# EAGLE board Dual H Bridge and Accessories (EAGLE 6.2)
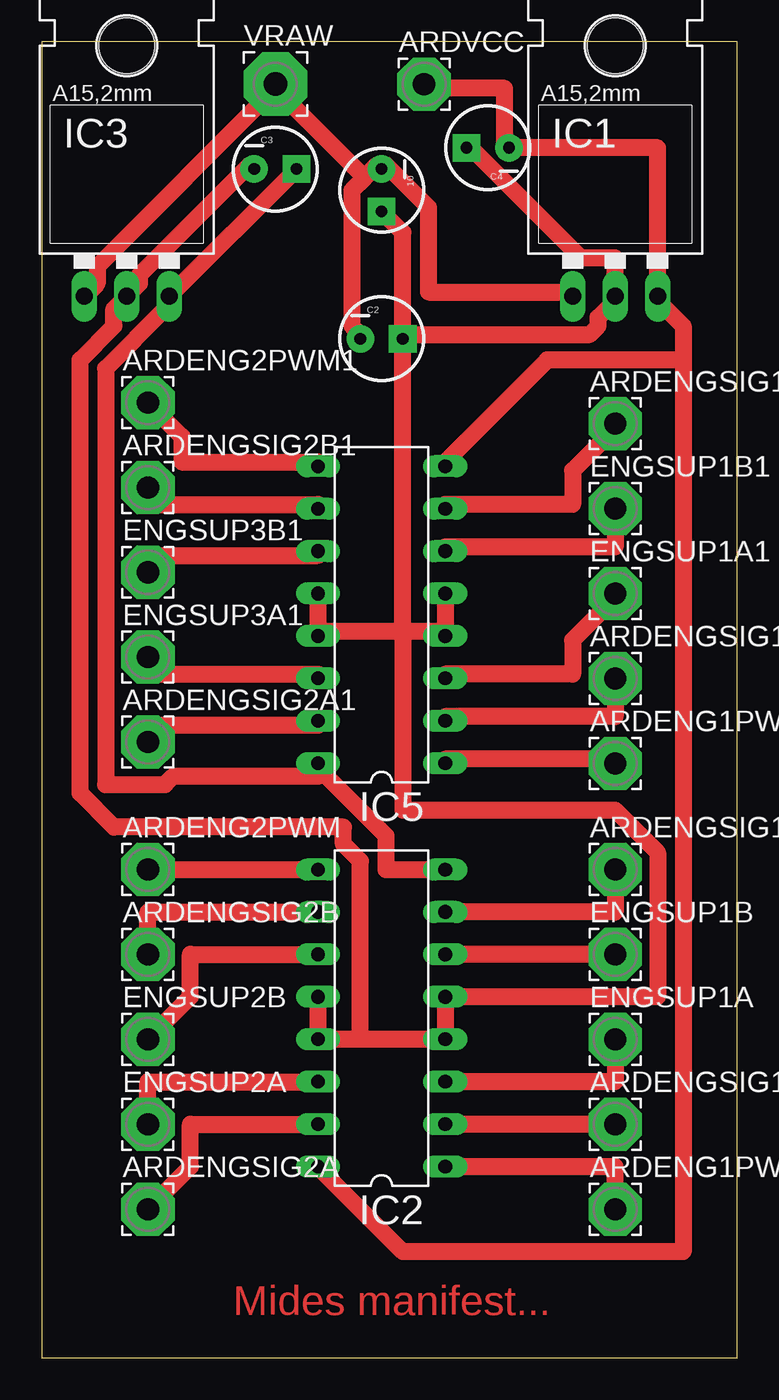
[diagram p0: board, top side]

Size 41.58 x 78.73 mm. Coordinates in mm from the lower left corner, seen from the top.
Outline: 0,0 41.58,0 41.58,78.73 0,78.73 0,0
Copper layers (1*16): Top 0.035mm / dielectric 1.5mm / Bottom 0.035mm
Design rules: minimum track width 40mil, minimum drill 24mil, track to track 10mil, track to pad 10mil, pad to pad 10mil, via to via 10mil, smd to smd 8mil, copper to edge 10mil, drill to drill 8mil, minimum pad ring 10mil, minimum via ring 8mil, stop-mask expansion 4mil, vias tented up to drill 0mil, thermal gap 10mil

## Footprints (pad centres in the part's own frame; a part is rotated, then mirrored left to right if it is on the bottom)
CPOL-RADIAL-10UF-25V = drill 0.7 pad 1.651 square: 1 1.27,0 | drill 0.7 pad 1.651: 2 -1.27,0
3,17/1,3 = drill 1.321 pad 3.175 octagon: 1 0,0
78XXL = drill 1.016 long: GND 0,-3.81; IN -2.54,-3.81; OUT 2.54,-3.81 | hole 3.302: 0,11.176
DIP16 = drill 0.813 long: 1 -10.16,-3.81; 2 -7.62,-3.81; 3 -5.08,-3.81; 4 -2.54,-3.81; 5 0,-3.81; 6 2.54,-3.81; 7 5.08,-3.81; 8 7.62,-3.81; 9 7.62,3.81; 10 5.08,3.81; 11 2.54,3.81; 12 0,3.81; 13 -2.54,3.81; 14 -5.08,3.81; 15 -7.62,3.81; 16 -10.16,3.81
3,81/1,4 = drill 1.397 pad 3.81 octagon: 1 0,0

## Placement (x,y rotation side)
10  10  [CPOL-RADIAL-10UF-25V]  20.32,69.85 270 top
ARDENG1PWM  Eng 1 Pwm  [3,17/1,3]  34.29,8.89 0 top
ARDENG1PWM1  Eng 1 Pwm  [3,17/1,3]  34.29,35.56 0 top
ARDENG2PWM  Eng2 Pwm  [3,17/1,3]  6.35,29.21 0 top
ARDENG2PWM1  Eng2 Pwm  [3,17/1,3]  6.35,57.15 0 top
ARDENGSIG1A  Eng Sig 1A  [3,17/1,3]  34.29,13.97 0 top
ARDENGSIG1A1  Eng Sig 1A  [3,17/1,3]  34.29,40.64 0 top
ARDENGSIG1B  Eng Sig 1B  [3,17/1,3]  34.29,29.21 0 top
ARDENGSIG1B1  Eng Sig 1B  [3,17/1,3]  34.29,55.88 0 top
ARDENGSIG2A  Eng Sig 2A  [3,17/1,3]  6.35,8.89 0 top
ARDENGSIG2A1  Eng Sig 2A  [3,17/1,3]  6.35,36.83 0 top
ARDENGSIG2B  Eng Sig 2B  [3,17/1,3]  6.35,24.13 0 top
ARDENGSIG2B1  Eng Sig 2B  [3,17/1,3]  6.35,52.07 0 top
ARDVCC  Ard VCC  [3,17/1,3]  22.86,76.2 0 top
C2  10  [CPOL-RADIAL-10UF-25V]  20.32,60.96 0 top
C3  .1  [CPOL-RADIAL-10UF-25V]  13.97,71.12 0 top
C4  .1  [CPOL-RADIAL-10UF-25V]  26.67,72.39 180 top
ENGSUP1A  Eng Sup 1A  [3,17/1,3]  34.29,19.05 0 top
ENGSUP1A1  Eng Sup 1A  [3,17/1,3]  34.29,45.72 0 top
ENGSUP1B  Eng Sup 1B  [3,17/1,3]  34.29,24.13 0 top
ENGSUP1B1  Eng Sup 1B  [3,17/1,3]  34.29,50.8 0 top
ENGSUP2A  Eng Sup 2A  [3,17/1,3]  6.35,13.97 0 top
ENGSUP2B  Eng Sup 2B  [3,17/1,3]  6.35,19.05 0 top
ENGSUP3A1  Eng Sup 2A  [3,17/1,3]  6.35,41.91 0 top
ENGSUP3B1  Eng Sup 2B  [3,17/1,3]  6.35,46.99 0 top
IC1  5v  [78XXL]  34.29,67.31 0 top
IC2  SN754410  [DIP16]  20.32,21.59 90 top
IC3  12v  [78XXL]  5.08,67.31 0 top
IC5  SN754410  [DIP16]  20.32,45.72 90 top
VRAW  VRaw  [3,81/1,4]  13.97,76.2 0 top

## Library data of the parts
10 C2-C4 = SparkFun
ARDENG1PWM ARDENG1PWM1 ARDENG2PWM ARDENG2PWM1 ARDENGSIG1A ARDENGSIG1A1 ARDENGSIG1B ARDENGSIG1B1 ARDENGSIG2A ARDENGSIG2A1 ARDENGSIG2B ARDENGSIG2B1 ARDVCC ENGSUP1A ENGSUP1A1 ENGSUP1B ENGSUP1B1 ENGSUP2A ENGSUP2B ENGSUP3A1 ENGSUP3B1 VRAW = wirepad
IC1 IC3 = v-reg
IC2 IC5 = HBridge

## Nets
ARDENGSIG1A: ARDENGSIG1A.1 IC2.2
ARDENGSIG1A1: ARDENGSIG1A1.1 IC5.2
ARDENGSIG1B: ARDENGSIG1B.1 IC2.7
ARDENGSIG1B1: ARDENGSIG1B1.1 IC5.7
ARDENGSIG2B: ARDENGSIG2B.1 IC2.10
ARDENGSIG2B1: ARDENGSIG2B1.1 IC5.10
GND: 10.1 C2.1 C3.2 C4.1 IC1.GND IC2.4 IC2.5 IC2.12 IC2.13 IC3.GND IC5.4 IC5.5 IC5.12 IC5.13
N$2: 10.2 C2.2 IC1.IN IC3.IN VRAW.1
N$3: ARDENG1PWM.1 IC2.1
N$4: ARDENG2PWM.1 IC2.9
N$6: ARDENGSIG2A.1 IC2.15
N$7: ARDENG1PWM1.1 IC5.1
N$8: ENGSUP1A.1 IC2.3
N$9: ENGSUP1B.1 IC2.6
N$10: ENGSUP2B.1 IC2.11
N$11: ENGSUP2A.1 IC2.14
N$12: C3.1 IC2.8 IC3.OUT IC5.16
N$13: ARDENG2PWM1.1 IC5.9
N$14: ARDENGSIG2A1.1 IC5.15
N$15: ENGSUP1A1.1 IC5.3
N$16: ENGSUP1B1.1 IC5.6
N$17: ENGSUP3B1.1 IC5.11
N$18: ENGSUP3A1.1 IC5.14
N$19: ARDVCC.1 C4.2 IC1.OUT IC2.16 IC5.8

## Tracks (layer width: path | path; a pad name or v marks a point on that pad's centre or on a via)
ARDENGSIG1A
  Top 1.016: ARDENGSIG1A.1 IC2.2
ARDENGSIG1A1
  Top 1.016: ARDENGSIG1A1.1 34.29,38.35 24.13,38.35 IC5.2
ARDENGSIG1B
  Top 1.016: IC2.7 34.29,26.67 ARDENGSIG1B.1
ARDENGSIG1B1
  Top 1.016: IC5.7 24.13,51.05 31.75,51.05 31.75,53.09 34.29,55.63 ARDENGSIG1B1.1
ARDENGSIG2B
  Top 1.016: IC2.10 6.35,26.67 ARDENGSIG2B.1
ARDENGSIG2B1
  Top 1.016: ARDENGSIG2B1.1 6.35,51.05 16.51,51.05 IC5.10
GND
  Top 1.016: 21.59,61.21 32.77,61.21 33.27,61.72 33.27,62.23 34.29,63.25 IC1.GND 34.29,65.79 32.26,65.79 25.65,72.39 C4.1 | 10.1 21.59,67.31 21.59,61.21 | 21.59,61.21 C2.1 21.59,43.43 | C3.2 12.45,71.37 5.84,64.77 5.84,64.26 IC3.GND 4.32,62.74 4.32,61.72 2.29,59.69 2.29,33.78 4.32,31.75 18.03,31.75 18.03,30.73 19.05,29.72 19.05,19.05 | IC2.12 IC2.13 19.05,19.05 | 19.05,19.05 IC2.4 IC2.5 36.83,21.59 36.83,30.23 34.29,32.77 21.59,32.77 21.59,43.43 | IC5.12 16.51,43.43 | IC5.5 24.13,43.43 | 24.13,43.43 21.59,43.43 | 21.59,43.43 16.51,43.43 | 16.51,43.43 IC5.13 | 24.13,43.43 IC5.4
N$2
  Top 1.016: IC1.IN 31.75,63.75 23.11,63.75 23.11,68.83 20.57,71.37 10.2 20.07,71.37 19.3,70.61 | 19.3,70.61 18.54,69.85 18.54,61.72 19.05,61.21 C2.2 | IC3.IN 3.3,64.26 3.3,65.28 13.97,75.95 | 13.97,75.95 19.3,70.61 | 13.97,75.95 VRAW.1
N$3
  Top 1.016: IC2.1 34.29,11.43 ARDENG1PWM.1
N$4
  Top 1.016: ARDENG2PWM.1 IC2.9
N$6
  Top 1.016: IC2.15 8.89,13.97 8.89,11.43 ARDENGSIG2A.1
N$7
  Top 1.016: IC5.1 24.13,35.81 34.29,35.81 ARDENG1PWM1.1
N$8
  Top 1.016: IC2.3 34.29,16.51 ENGSUP1A.1
N$9
  Top 1.016: ENGSUP1B.1 IC2.6
N$10
  Top 1.016: IC2.11 8.89,24.13 8.89,21.59 ENGSUP2B.1
N$11
  Top 1.016: IC2.14 6.35,16.51 ENGSUP2A.1
N$12
  Top 1.016: IC2.8 20.57,29.21 20.57,31.24 16.76,35.05 | 16.76,35.05 16.51,35.31 IC5.16 | C3.1 IC3.OUT 7.37,63.25 7.37,62.74 3.81,59.18 3.81,34.29 7.37,34.29 7.87,34.8 16.51,34.8 16.76,35.05
N$13
  Top 1.016: ARDENG2PWM1.1 8.38,55.12 8.38,53.59 16.51,53.59 IC5.9
N$14
  Top 1.016: ARDENGSIG2A1.1 6.35,37.85 16.51,37.85 IC5.15
N$15
  Top 1.016: IC5.3 24.13,40.89 31.75,40.89 31.75,42.93 34.29,45.47 ENGSUP1A1.1
N$16
  Top 1.016: ENGSUP1B1.1 34.29,48.51 24.13,48.51 IC5.6
N$17
  Top 1.016: ENGSUP3B1.1 6.35,48.01 16.51,48.01 IC5.11
N$18
  Top 1.016: ENGSUP3A1.1 6.35,40.89 16.51,40.89 IC5.14
N$19
  Top 1.016: IC2.16 21.59,6.35 38.35,6.35 38.35,59.69 | 38.35,59.69 38.35,61.72 36.83,63.25 IC1.OUT 36.83,72.39 C4.2 27.69,72.39 27.69,75.95 23.11,75.95 ARDVCC.1 | 38.35,59.69 30.23,59.69 24.13,53.59 IC5.8

## Text on the board
Top: Mides manifest...